# Altium PCB PCB_typeC.PcbDoc
Units mm, origin at the board's own origin, x right, y up, seen from the top; angles counter-clockwise.
Board outline 132 x 50.15 mm, 2 copper layers (Top Layer, Bottom Layer), stack 1 mm thick; 71 components, 45 nets, 213 pads, 136 vias.
Unrouted connection lines stored in the file: 3.
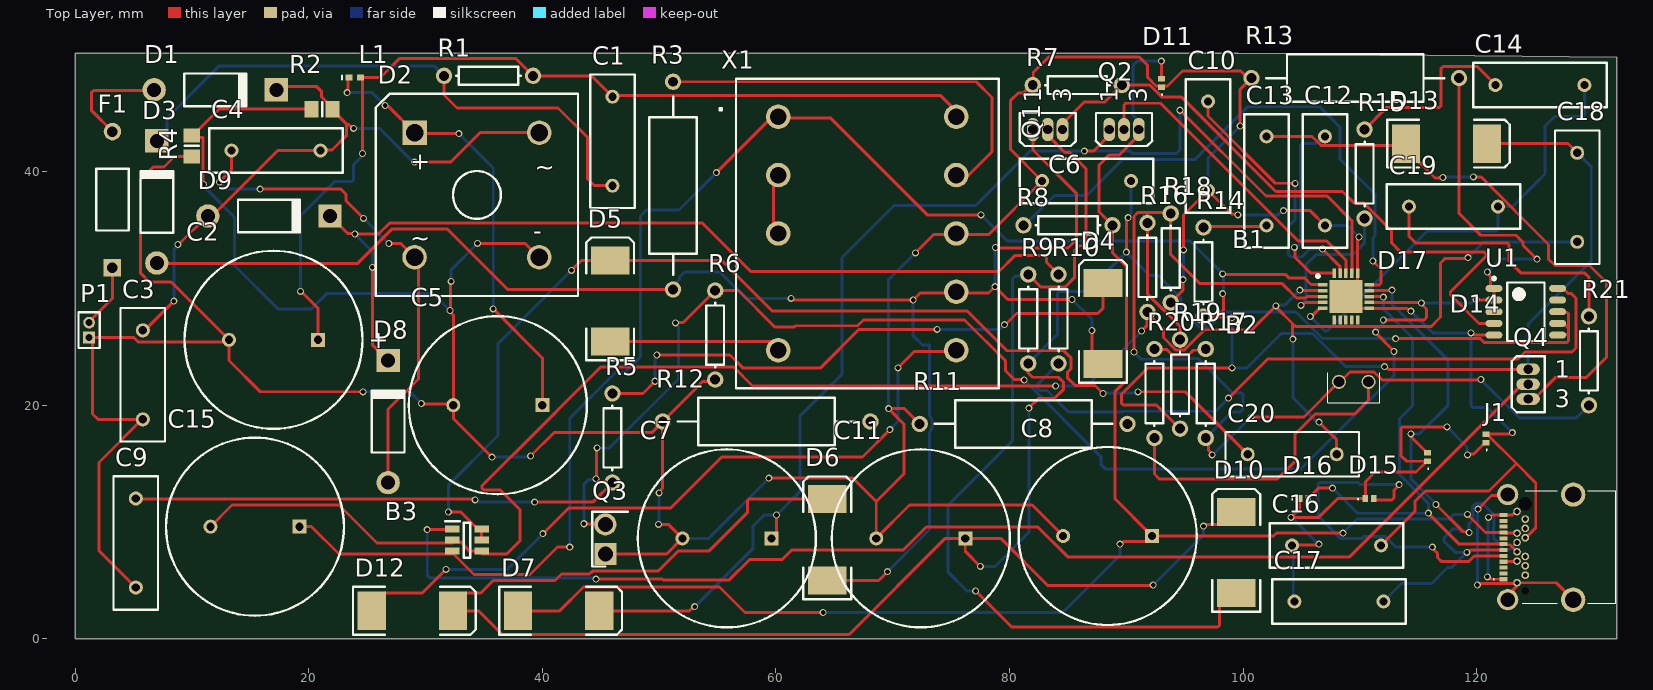
[diagram p0: Top Layer view]
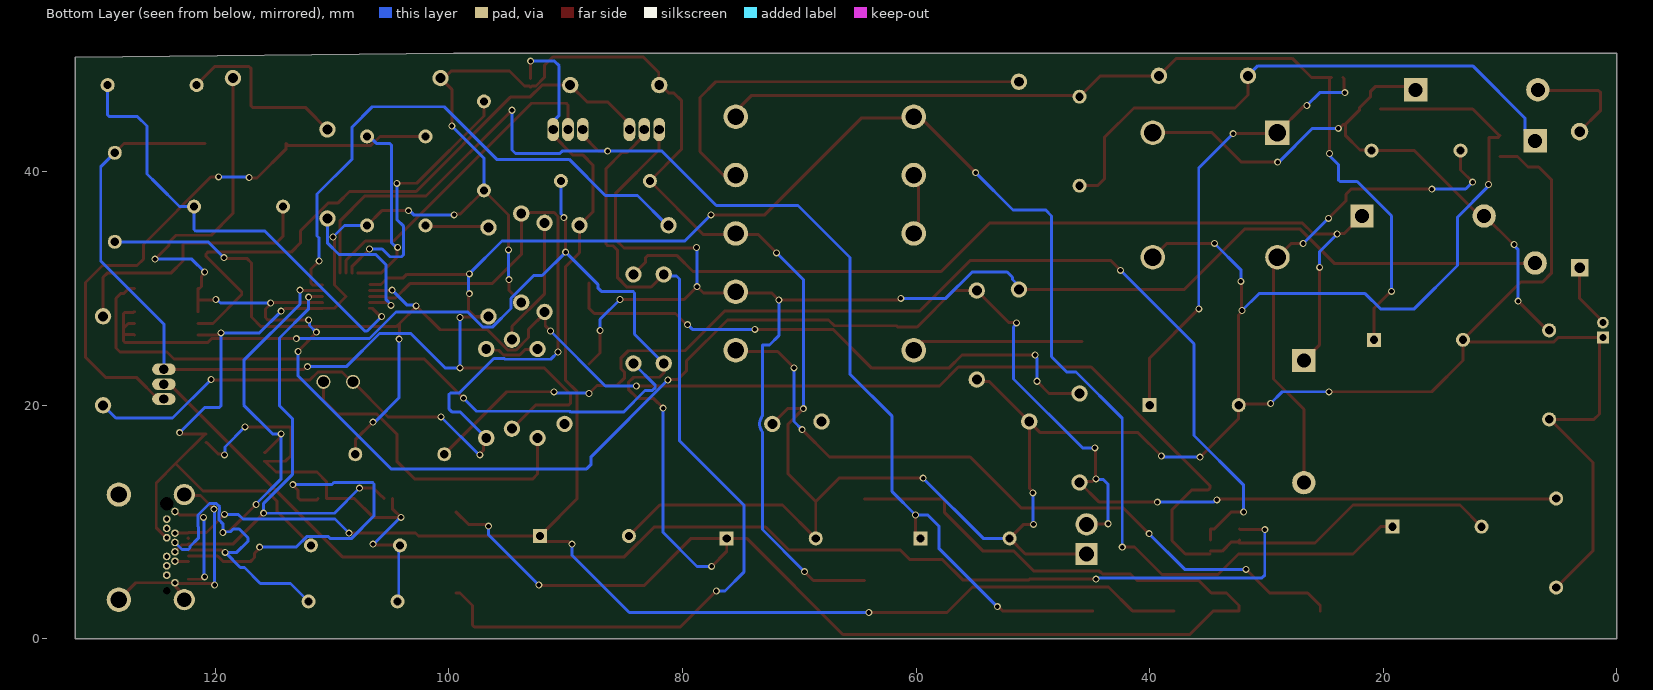
[diagram p1: Bottom Layer view, seen from below]

## Layer stack, top to bottom
Top Solder: solder mask 0.05, Solder Resist, Dk 3.5
Top Layer: signal copper 0.1
Dielectric 1: dielectric 0.8, FR-4, Dk 4.8
Bottom Layer: signal copper 0.1
Bottom Solder: solder mask 0.05, Solder Resist, Dk 3.5

## Board outline
132,0 132,49.8 99.6,50.146 -0.001,50.146 0,0

## Design rules (kind name [scope] priority, off if disabled: settings)
Clearance 74030 [All] p1: gap=0.05 ignorepadtopadclearanceinfootprint=FALSE
Clearance [All] p2: gap=0.254 ignorepadtopadclearanceinfootprint=FALSE except(0: Arc-Hole Track-Hole SMDPad-Hole THPad-Hole Via-Hole Fill-Hole Poly-Hole Region-Hole Text-Hole)
MinimumSolderMaskSliver [All] p1: minsoldermaskwidth=0.05
PolygonConnect [All] p1: connectstyle=Relief reliefconductorwidth=0.254 reliefentries=4 polygonreliefangle="90 Angle" airgapwidth=0.254
RoutingVias [All] p1: holewidth=0.4 width=0.6 viastyle="Through Hole" minholewidth=0.4 minwidth=0.6 maxholewidth=0.4 maxwidth=0.6
SolderMaskExpansion [All] p1: expansion=0.102 istentingtop=FALSE
Width Width_1 [All] p1: maxlimit=0.254 minlimit=0.254 preferedwidth=0.254
Width [InNet('VCC')] p2: maxlimit=0.51 minlimit=0.4 preferedwidth=0.5
29 further rules are at their usual default settings.

## Components (designator, comment, footprint, x,y, rotation, side; value= is the part's Value field where it differs from the comment)
B1 "FUSB15101MNTWG" QFN50P400X400X100-21N 108.8,29.3 r0 top
B2 "QEE113E3R0" QEE113E3R0 108.2,22 r0 top
B3 "NCP4307FASNT1G" SOT95P275X110-6N 33.55,8.45 r0 top
C1 "Cap" RAD-0.3 46,42.6 r90 top value=100pF
C2 "Cap Pol1" RB7.6-15 16.99,25.6 r0 top value=100pF
C3 "Cap" RAD-0.3 5.8,22.6 r90 top value=100pF
C4 "Cap" RAD-0.3 17.2,41.8 r0 top value=100pF
C5 "Cap Pol1" RB7.6-15 36.19,20 r0 top value=100pF
C6 "Cap" RAD-0.3 86.6,39.2 r0 top value=100pF
C7 "" RB7.6-15 55.8,8.6 r0 top value=100pF
C8 "Cap Pol1" RB7.6-15 88.4,8.8 r0 top value=100pF
C9 "Cap" RAD-0.3 5.2,8.2 r90 top value=100pF
C10 "Cap" RAD-0.3 97,42.2 r90 top value=100pF
C11 "Cap Pol1" RB7.6-15 72.4,8.6 r0 top value=100pF
C12 "Cap" RAD-0.3 107,39.2 r90 top value=100pF
C13 "Cap" RAD-0.3 102,39.2 r90 top value=100pF
C14 "Cap" RAD-0.3 125.4,47.4 r0 top value=100pF
C15 "Cap Pol1" RB7.6-15 15.4,9.6 r0 top value=100pF
C16 "Cap" RAD-0.3 108,8 r0 top value=100pF
C17 "Cap" RAD-0.3 108.2,3.2 r0 top value=100pF
C18 "Cap" RAD-0.3 128.6,37.8 r90 top value=100pF
C19 "Cap" RAD-0.3 118,37 r0 top value=100pF
C20 "Cap" RAD-0.3 104.2,15.8 r0 top value=100pF
D1 "Diode 1N4001" DO-41 12,47 r0 top
D2 "Bridge2" D-46_6A 34.4,38 r0 top
D3 "Diode 1N4001" DO-41 7,37.4 r90 top
D4 "Diode" SMC 88,27 r90 top
D5 "Diode" SMC 45.8,28.925 r90 top
D6 "Diode" SMC 64.4,8.475 r90 top
D7 "Diode" SMC 41.4,2.4 r0 top
D8 "Diode 1N4001" DO-41 26.8,18.6 r90 top
D9 "Diode 1N4001" DO-41 16.6,36.2 r0 top
D10 "" SMC 99.4,7.4 r90 top
D11 "SZESD7241N2T5G" SZESD7462N2T5G 93,47.585 r90 top
D12 "Diode" SMC 28.875,2.4 r0 top
D13 "Diode" SMC 117.4,42.4 r0 top
D14 "SZESD7241N2T5G" SZESD7462N2T5G 120.8,17.165 r90 top
D15 "SZESD7241N2T5G" SZESD7462N2T5G 110.835,12 r0 top
D16 "SZESD7241N2T5G" SZESD7462N2T5G 105.2,12 r0 top
D17 "SZESD7241N2T5G" SZESD7462N2T5G 115.8,15.565 r90 top
F1 "Fuse 1" PIN-W2/E2.8 3.2,37.6 r90 top
J1 "UJ31-CH-G2-SMT-TR" UJ31CHG2SMTTR 128.25,7.85 r90 top
L1 "Inductor" 0402-A 23.95,48.05 r0 top value=10mH
P1 "MHDR1X2" MHDR1X2 1.2,25.8 r90 top
Q1 "MOSFET-N" E3 83.27,43.6 r90 top
Q2 "MOSFET-N" E3 89.8,43.6 r90 top
Q3 "QSE113" TO254P304X444X533-2P 45.4,7.26 r90 top
Q4 "MOSFET-N" E3 124.4,21.8 r0 top
R1 "Res1" AXIAL-0.3 35.4,48.2 r0 top value=1K
R2 "Res Varistor" 6-0805_N 21.15,45.35 r0 top
R3 "Res Adj1" AXIAL-0.7 51.2,38.8 r90 top value=1K
R4 "Res Varistor" 6-0805_N 10,42.2 r90 top
R5 "Res1" AXIAL-0.3 46,17.2 r90 top value=1K
R6 "Res1" AXIAL-0.3 54.8,26 r90 top value=1K
R7 "Res1" AXIAL-0.3 85.8,47.4 r0 top value=1K
R8 "Res1" AXIAL-0.3 85,35.4 r0 top value=1K
R9 "Res1" AXIAL-0.3 81.6,27.39 r90 top value=1K
R10 "Res1" AXIAL-0.3 84.2,27.39 r90 top value=1K
R11 "Res Adj1" AXIAL-0.7 81.2,18.4 r0 top value=1K
R12 "Res Adj1" AXIAL-0.7 59.2,18.6 r0 top value=1K
R13 "Res Adj1" AXIAL-0.7 109.6,48 r0 top value=1K
R14 "Res1" AXIAL-0.3 96.6,31.4 r90 top value=1K
R15 "Res1" AXIAL-0.3 110.4,39.8 r90 top value=1K
R16 "Res1" AXIAL-0.3 91.8,31.8 r90 top value=1K
R17 "Res1" AXIAL-0.3 96.8,21 r90 top value=1K
R18 "Res1" AXIAL-0.3 93.8,32.6 r90 top value=1K
R19 "Res1" AXIAL-0.3 94.6,21.8 r90 top value=1K
R20 "Res1" AXIAL-0.3 92.4,21 r90 top value=1K
R21 "Res1" AXIAL-0.3 129.6,23.8 r90 top value=1K
U1 "NCP1345" SOP100P600X265-10N 124.2,28 r0 top
X1 "74030" 74030 67.83,34.7 r0 top

## Footprints (in the part's own frame and the unit in brackets; to place one, negate y for a bottom-side part, rotate by r counter-clockwise, add the part's x,y. Pads: shape width x height; smd on the part's side, far side on the other; paste and mask are expansions set on the pad)
6-0805_N [mm] "Chip Resistor, Body 2.0x1.2mm, IPC Medium Density"
  rect 1.2x1.4 smd: 1(-0.9,0) 2(0.9,0)
  silkscreen extent 0,-0.6 0,0.6, body extent -1.8,-1 1.8,1, height 0.7
0402-A [mm] "Chip Inductor, Body 1.0x0.5mm, IPC High Density"
  rect 0.6x0.5 smd: 1(-0.5,0) 2(0.5,0)
  silkscreen extent -1.1,-0.15 -1.1,0.15, body extent -0.95,-0.4 0.95,0.4, height 0.55
74030 [mm]
  round 2.1 hole 1.4: 1(-7.62,10) 2(-7.62,5) 3(-7.62,0) 5(-7.62,-10) 6(7.62,-10) 7(7.62,-5) 8(7.62,0) 9(7.62,5) 10(7.62,10)
  silkscreen extent -12.66,-13.25 11.25,13.25, body extent -11.35,-13.35 11.35,13.35, height 12.7
AXIAL-0.3 [mm] "Axial Device, Thru-Hole; 2 Leads; 0.3 in Pin Spacing"
  round 1.4 hole 0.85: 1(-3.81,0) 2(3.81,0)
  silkscreen extent -2.77,-0.76 2.77,0.76, body extent -4.61,-0.86 4.61,0.86, height 1.52
AXIAL-0.7 [mm] "Axial Device, Thru-Hole; 2 Leads; 0.7 in Pin Spacing"
  round 1.4 hole 0.85: 1(-8.89,0) 2(8.89,0)
  silkscreen extent -7.62,-2.03 7.62,2.03, body extent -9.69,-2.13 9.69,2.13, height 4.06
D-46_6A [mm] "Bridge Rectifier; 4 Terminals; Body 16.8 x 16.8 mm (typ); Pitch 10.67 mm"
  rect 2.1x2.1 hole 1.5: 1(-5.335,5.335)
  round 2.1 hole 1.5: 2(-5.335,-5.335) 3(5.335,-5.335) 4(5.335,5.335)
  silkscreen extent -8.65,-8.65 8.65,8.65, body extent -8.75,-8.75 8.75,8.75, height 6.35
DO-41 [mm] "Diode, Axial; Body 5.2 x 2.7 mm (LxDia. max), Lead Dia. 0.86 mm (max)"
  round 2 hole 1.2: 1(-5.23,0)
  rect 2x2 hole 1.2: 2(5.23,0)
  silkscreen extent -2.65,-1.4 2.75,1.4, body extent -6.33,-1.5 6.33,1.5, height 2.8
E3 [mm] "TO, Flat Index; 3 In-Line, Axial Leads; Body Dia. 4.6mm; Lead Dia. 0.5 mm (max)"
  oval 2x1 hole 0.8: 1(0,1.27) 2(0,0) 3(0,-1.27)
  silkscreen extent -1.41,-2.41 1.41,2.41, body extent -1.51,-2.51 1.51,2.51, height 4.01
MHDR1X2 [mm] "Connector; Header; 2 Position"
  rect 1x1 hole 0.6: 1(0,0)
  round 1 hole 0.6: 2(1.27,0)
  silkscreen extent -0.9,-0.9 2.17,0.9, body extent -1,-1 2.27,1
PIN-W2/E2.8 [mm] "Thru-Hole; 2 Leads"
  rect 1.5x1.5 hole 0.9: 1(-5.825,0)
  round 1.5 hole 0.9: 2(5.825,0)
  silkscreen extent -2.65,-1.4 2.65,1.4, body extent -6.68,-1.5 6.68,1.5
QEE113E3R0 [mm]
  round 1.2 hole 0.92: 1(0,0) 2(2.54,0)
  silkscreen extent -0.95,-1.78 3.49,0.76, body extent -10,-3.38 10,3.38, height 5.8
QFN50P400X400X100-21N [mm]
  rect 0.8x0.3 smd mask+0.051: 1(-2,1) 2(-2,0.5) 3(-2,0) 4(-2,-0.5) 5(-2,-1) 11(2,-1) 12(2,-0.5) 13(2,0) 14(2,0.5) 15(2,1)
  rect 0.3x0.8 smd mask+0.051: 6(-1,-2) 7(-0.5,-2) 8(0,-2) 9(0.5,-2) 10(1,-2) 16(1,2) 17(0.5,2) 18(0,2) 19(-0.5,2) 20(-1,2)
  rect 2.8x2.8 smd: 21(0,0)
  silkscreen extent -2.52,1.63 -2.27,1.87
RAD-0.3 [mm] "Radial Cap, Thru-Hole; 2 Leads; 0.3 in Pin Spacing"
  round 1.2 hole 0.7: 1(-3.81,0) 2(3.81,0)
  silkscreen extent -5.71,-1.91 5.71,1.91, body extent -5.81,-2 5.81,2, height 6
RB7.6-15 [mm] "Polarized Capacitor (Radial); 2 Leads"
  rect 1.2x1.2 hole 0.7: 1(3.81,0)
  round 1.2 hole 0.7: 2(-3.81,0)
  silkscreen extent -7.62,-7.62 7.62,7.62, body extent -7.72,-7.72 7.72,7.72
SMC [mm] "DO-214-AB/SMC; 2 C-Bend Leads; Body 7.9 x 5.9 mm, inc. leads (LxW)"
  rect 2.4x3.3 smd: 1(-3.475,0) 2(3.475,0)
  silkscreen extent -5.07,-2.05 5.43,2.05, body extent -5.17,-2.15 5.53,2.15, height 2.65
SOP100P600X265-10N [mm] "SOP, 10-Leads, Body 4.90x3.90mm, Pitch 1.00mm, IPC Medium Density"
  oval 1.45x0.6 smd: 1(-2.725,2) 2(-2.725,1) 3(-2.725,0) 4(-2.725,-1) 5(-2.725,-2) 6(2.725,-2) 7(2.725,-1) 8(2.725,0) 9(2.725,1) 10(2.725,2)
  silkscreen extent -2.85,-2.5 1.6,2.97, body extent -2,-2.5 2,2.5, height 2.65
SOT95P275X110-6N [mm]
  rect 1.25x0.6 smd: 1(-1.25,0.95) 2(-1.25,0) 3(-1.25,-0.95) 4(1.25,-0.95) 5(1.25,0) 6(1.25,0.95)
  silkscreen extent -1.88,-1.5 0.28,1.6, body extent -10,-3.38 10,3.38, height 5.8
SZESD7462N2T5G [mm]
  rect 0.47x0.6 smd: 1(-0.365,0) 2(0.365,0)
  silkscreen extent -1.05,-0.1 -0.95,0, body extent -2.1,-1.35 1.65,1.35
TO254P304X444X533-2P [mm]
  rect 1.905x1.905 / inner round 1.905 / far side rect 1.905x1.905 hole 1.27: 1(0,0)
  round 1.905 hole 1.27: 2(2.54,0)
  silkscreen extent -1.07,-1.93 3.61,1.11, body extent -1.35,-2.2 3.89,1.38
UJ31CHG2SMTTR [mm]
  rect 0.35x0.7 smd mask+0.051: A1(-2.75,5.95) A2(-2.25,5.95) A3(-1.75,5.95) A4(-1.25,5.95) A5(-0.75,5.95) A6(-0.25,5.95) A7(0.25,5.95) A8(0.75,5.95) A9(1.25,5.95) A10(1.75,5.95) A11(2.25,5.95) A12(2.75,5.95)
  round 0.65 hole 0.4: B1(3.05,4.8) B12(-3.05,4.8)
  round 0.65 hole 0.4 paste+0 mask+0.051: B2(2.4,4.1) B3(1.6,4.1) B4(1.2,4.8) B5(0.8,4.1) B6(0.4,4.8) B7(-0.4,4.8) B8(-0.8,4.1) B9(-1.2,4.8) B10(-1.6,4.1) B11(-2.4,4.1)
  round 0.575 hole 1.15 unplated: MH5(3.725,4.1)
  round 0.325 hole 0.65 unplated: MH6(-3.725,4.1)
  round 1.815 hole 1.22: S1(-4.5,5.6) S4(4.5,5.6)
  round 2.085 hole 1.393: S2(-4.5,0) S3(4.5,0)
  silkscreen extent -4.82,-3.65 4.82,6.85, body extent -10,-3.38 10,3.38, height 5.8

## Part data
B1: "Programmable USB Type-C and Power Delivery 3.1 Source Controller with PPS Support", Manufacturer_Name=onsemi, Mouser Part Number=863-FUSB15101MNTWG, Datasheet Link=https://www.onsemi.com/download/data-sheet/pdf/fusb15101-d.pdf, Geometry.Height=1mm, Manufacturer_Part_Number=FUSB15101MNTWG, Mouser Price/Stock=https://www.mouser.co.uk/ProductDetail/onsemi/FUSB15101MNTWG?qs=vvQtp7zwQdPKtIXEUZSS0g%3D%3D
B2: "Infrared Emitters infrared Lt Emitting Plastic", Manufacturer_Name=onsemi, Mouser Part Number=512-QEE113E3R0, Arrow Part Number=QEE113E3R0, Arrow Price/Stock=https://www.arrow.com/en/products/qee113e3r0/on-semiconductor?region=nac, Datasheet Link=https://www.arrow.com/en/products/qee113e3r0/on-semiconductor, Geometry.Height=5.08mm, Manufacturer_Part_Number=QEE113E3R0, Mouser Price/Stock=https://www.mouser.co.uk/ProductDetail/ON-Semiconductor-Fairchild/QEE113E3R0?qs=q8yi3gPquyFixpeP%252BjxTrw%3D%3D
B3: "Secondary Side Synchronous Rectification Driver with Dual Supply", Manufacturer_Name=onsemi, Datasheet Link=https://www.onsemi.com/download/data-sheet/pdf/ncp4307-d.pdf, Geometry.Height=1.1mm, Manufacturer_Part_Number=NCP4307FASNT1G
C1 C3 C4 C6 C9 C10 C12 C13 C14 C16 C17 C18 C19 C20: "Capacitor", LatestRevisionDate=17-Jul-2002, LatestRevisionNote="Re-released for DXP Platform.", PackageDescription="Radial Cap, Thru-Hole; 2 Leads; 0.3 in Pin Spacing", PackageReference=RAD-0.3, Published=8-Jun-2000, Publisher="Altium Limited"
C2 C5 C8 C11 C15: "Polarized Capacitor (Radial)", LatestRevisionDate=17-Jul-2002, LatestRevisionNote="Re-released for DXP Platform.", PackageDescription="Polarized Capacitor (Radial); 2 Leads", PackageReference=RB7.6-15, Published=8-Jun-2000, Publisher="Altium Limited"
C7: library part "Cap Pol1", "Polarized Capacitor (Radial)", LatestRevisionDate=17-Jul-2002, LatestRevisionNote="Re-released for DXP Platform.", PackageDescription="Polarized Capacitor (Radial); 2 Leads", PackageReference=RB7.6-15, Published=8-Jun-2000, Publisher="Altium Limited"
D1 D3 D8 D9: "1 Amp General Purpose Rectifier", Code_JEDEC=DO-204-AL, ComponentLink1Description="Manufacturer Link", ComponentLink1URL=http://www.fairchildsemi.com/, ComponentLink2Description=Datasheet, ComponentLink2URL=http://www.fairchildsemi.com/ds/1N%2F1N4001.pdf, DatasheetVersion=1998, LatestRevisionDate=17-Jul-2002, LatestRevisionNote="Re-released for DXP Platform.", PackageDescription="Diode, Axial; Body 5.2 x 2.7 mm (LxDia. max), Lead Dia. 0.86 mm (max)", PackageReference=DO-41, PackageVersion=Aug-1999, Published=8-Jun-2000, Publisher="Altium Limited"
D2: "Diode Bridge", LatestRevisionDate=17-Jul-2002, LatestRevisionNote="Re-released for DXP Platform.", PackageDescription="Bridge Rectifier; 4 Terminals; Body 16.8 x 16.8 mm (typ); Pitch 10.67 mm", PackageReference=D-46_6A, Published=24-Mar-1999, Publisher="Altium Limited"
D4 D5 D6 D7 D12 D13: "Default Diode", Code_JEDEC=DO-214-AB, LatestRevisionDate=17-Jul-2002, LatestRevisionNote="Re-released for DXP Platform.", PackageDescription="DO-214-AB/SMC; 2 C-Bend Leads; Body 7.9 x 5.9 mm, inc. leads (LxW)", PackageReference=SMC, PackageVersion=Sep-1996, Published=8-Jun-2000, Publisher="Altium Limited"
D10: library part Diode, "Default Diode", Code_JEDEC=DO-214-AB, LatestRevisionDate=17-Jul-2002, LatestRevisionNote="Re-released for DXP Platform.", PackageDescription="DO-214-AB/SMC; 2 C-Bend Leads; Body 7.9 x 5.9 mm, inc. leads (LxW)", PackageReference=SMC, PackageVersion=Sep-1996, Published=8-Jun-2000, Publisher="Altium Limited"
D11 D14 D15 D16 D17: "ESD Suppressors / TVS Diodes SZ 24V VRWM ESD PROTECTION", Manufacturer_Name=onsemi, Mouser Part Number=863-SZESD7241N2T5G, Datasheet Link=https://www.onsemi.com/pub/Collateral/ESD7241-D.PDF, Geometry.Height=0.4mm, Manufacturer_Part_Number=SZESD7241N2T5G, Mouser Price/Stock=https://www.mouser.co.uk/ProductDetail/onsemi/SZESD7241N2T5G?qs=z6PAvqrnkvSq0oMCl81g4Q%3D%3D
F1: "Fuse", LatestRevisionDate=17-Jul-2002, LatestRevisionNote="Re-released for DXP Platform.", PackageDescription="Thru-Hole; 2 Leads", PackageReference=PIN-W2/E2.8, Published=8-Jun-2000, Publisher="Altium Limited"
J1: "USB Connectors USB jack 3.1 C type 24pin Horz SMT", Manufacturer_Name="CUI Devices", Mouser Part Number=490-UJ31-CH-G2SMT-TR, Arrow Part Number=UJ31-CH-G2-SMT-TR, Arrow Price/Stock=https://www.arrow.com/en/products/uj31-ch-g2-smt-tr/cui-devices?region=nac, Datasheet Link=https://www.arrow.com/en/products/uj31-ch-g2-smt-tr/cui-devices, Geometry.Height=4.66mm, Manufacturer_Part_Number=UJ31-CH-G2-SMT-TR, Mouser Price/Stock=https://www.mouser.co.uk/ProductDetail/CUI-Devices/UJ31-CH-G2-SMT-TR?qs=W0yvOO0ixfGEsh2EYrPgIQ%3D%3D
P1: "Header, 2-Pin", LatestRevisionDate=17-Jul-2002, LatestRevisionNote="Re-released for DXP Platform.", Publisher="Altium Limited"
Q1 Q2 Q4: "N-Channel MOSFET", LatestRevisionDate=17-Jul-2002, LatestRevisionNote="Re-released for DXP Platform.", PackageDescription="TO, Flat Index; 3 In-Line, Axial Leads; Body Dia. 4.6mm; Lead Dia. 0.5 mm (max)", PackageReference=E3, PackageVersion=1995/1996, Published=8-Jun-2000, Publisher="Altium Limited"
Q3: "IC, Fairchild, QSE113 Fairchild Semiconductor QSE113 25 ?? Infrared Phototransistor, Through-hole Side-looker Package", Manufacturer_Name=onsemi, Mouser Part Number=512-QSE113, Arrow Part Number=QSE113, Arrow Price/Stock=https://www.arrow.com/en/products/qse113/on-semiconductor, Geometry.Height=3.04mm, Manufacturer_Part_Number=QSE113, Mouser Price/Stock=https://www.mouser.com/Search/Refine.aspx?Keyword=512-QSE113
R1 R5 R6 R7 R8 R9 R10 R14 R15 R16 R17 R18 R19 R20 R21: "Resistor", LatestRevisionDate=17-Jul-2002, LatestRevisionNote="Re-released for DXP Platform.", PackageDescription="Axial Device, Thru-Hole; 2 Leads; 0.3 in Pin Spacing", PackageReference=AXIAL-0.3, Published=8-Jun-2000, Publisher="Altium Limited"
R2 R4: "Varistor (Voltage-Sensitive Resistor)", Code_IPC=RESC2012, LatestRevisionDate=29-May-2009, LatestRevisionNote="IPC-7351 Footprint Added.", PackageDescription="Chip Resistor 0805 Case Size", PackageReference=6-0805, PackageVersion=Mar-2003, Published=24-Mar-1999, Publisher="Altium Limited"
R3 R11 R12 R13: "Variable Resistor", LatestRevisionDate=17-Jul-2002, LatestRevisionNote="Re-released for DXP Platform.", PackageDescription="Axial Device, Thru-Hole; 2 Leads; 0.7 in Pin Spacing", PackageReference=AXIAL-0.7, Published=8-Jun-2000, Publisher="Altium Limited", Set Position=0.5
X1: "Transformer PCB Flyback EE25 750uH 3 Output 15  30W Flyback Switch Mode Power Supply Transformer, 85  265V ac", Manufacturer_Name=MYRRA, Arrow Part Number=74030, Arrow Price/Stock=https://www.arrow.com/en/products/74030/myrra, Manufacturer_Part_Number=74030
L1: Code_IEC=1005, Code_JEITA=0402, LatestRevisionDate=29-May-2009, LatestRevisionNote="IPC-7351 Footprint Added.", PackageDescription="Chip Inductor", PackageReference=0402-A, Published=8-Jun-2000, Publisher="Altium Limited"

## Via types
v1: diameter 0.6, hole 0.4, Top Layer to Bottom Layer, 136 vias

## Nets (pads, with @x,y where several pads share a name; then routed paths per layer and width w, separated by ;. In a path a pad name is that pad's centre, name@x,y a point inside that pad or via, vN(x,y) a via of type N, cw(c..) or ccw(c..) an arc to the next point about the centre after c; other vN are vias at no path point)
GND: B1.11 B1.16 B1.21 C2.2 C3.1 C5.2 C6.1 C7.2 C8.2 C9.1 C10.1 C11.2 C12.1 C16.2 D2.3 D11.1 D14.2 J1.B5 P1.1 Q3.1 R2.1 R4.1 R4.2 R6.1 R7.1 R11.1 R12.1 R13.1 R18.1 U1.5 X1.8 | length 408.9
  Top Layer w0.254: C9.1 2.05,7.54 2.05,15.1 C3.1@5.74,18.79 ; C3.1 C3.1@5.74,18.79 ; R4.1 8.513,41.3 7.613,40.4 6.7,40.4 5.619,39.319 5.619,31.289 6.358,30.55 8.23,30.55 C2.2 ; v1(11,38.9) 10.95,38.95 10.95,42.901 10.199,42.901 R4.2 10.1,43.1 12.35,45.35 R2.1 ; v1(24.65,21.15) 15.85,21.15 13.18,23.82 C2.2 ; v1(29.65,20.15) 29.716,20.084 32.296,20.084 C5.2 ; v1(32.2,30.6) 32.15,30.55 32.15,28.15 v1(32.1,28.1) 32.1,28.006 32.38,27.726 C5.2 ; v1(34.45,33.85) 38.55,33.85 D2.3 ; v1(35.7,15.55) 32.38,18.87 C5.2 ; v1(39,15.65) 41,17.65 49.36,17.65 R12.1 ; Q3.1 50.65,7.26 C7.2 50.79,9.8 v1(49.95,9.8) ; v1(50,12.5) 50,12.594 50.31,12.904 R12.1 ; R6.1 54.619,22.009 53.719,22.009 R12.1 ; v1(59.4,13.75) 66.6,13.75 68.59,11.76 ; v1(71.95,33.05) 73.5,34.6 78.19,34.6 C6.1 80.1,41.89 80.1,46.1 80.715,46.715 81.146,46.715 81.831,47.4 R7.1 82.031,47.441 82.031,48.481 83.35,49.8 91.1,49.8 91.824,49.076 91.824,48.052 92.548,47.328 92.892,47.328 D11.1 93.108,47.328 93.528,47.328 94.8,48.6 99.8,48.6 100.4,48 R13.1 99.75,47.04 v1(99.75,43.9) ; R11.1 71.01,19.7 v1(69.65,19.7) 70.95,18.4 70.95,14.12 68.59,11.76 ; C8.2 81.94,11.45 71.44,11.45 C11.2 68.59,11.76 ; R18.1 94.85,29.84 v1(94.85,30.75) ; v1(94.9,33.3) 94.9,36.29 C10.1 99.024,36.366 99.484,36.366 v1(99.55,36.3) ; v1(103.45,36.65) 105.74,36.65 C12.1 ; v1(109.923,34.4) 109.923,34.306 109.8,34.183 B1.16 109.8,30.3 B1.21 109.8,28.3 B1.11 ; B1.11@110.8,28.277 114.029,28.277 114.256,28.05 v1(114.35,28.05) ; C16.2 114.7,10.89 114.7,11.75 115.6,12.65 121.05,12.65 123.398,14.997 ; v1(119.5,26.2) 119.594,26.2 119.794,26 U1.5 ; D14.2 D14.2@120.865,17.53 ; v1(123.05,17.65) 122.956,17.65 122.836,17.53 D14.2@120.865,17.53 ; J1.B5 124.2,8.65 125.05,9.5 125.05,13.345 123.398,14.997 ; C3.1@5.74,18.79 1.96,18.79 1.5,19.25 1.5,25.5 P1.1 5.023,25.8 5.394,25.429 13.009,25.429 C2.2 ; D14.2@120.865,17.53 123.398,14.997
  Bottom Layer w0.254: v1(11,38.9) 11.05,38.85 11.05,38.7 13.65,36.1 13.65,31.95 17.35,28.25 20.25,28.25 21.55,29.55 30.65,29.55 v1(32.1,28.1) ; v1(24.65,21.15) 28.65,21.15 v1(29.65,20.15) ; v1(32.2,30.6) 32.2,31.6 v1(34.45,33.85) ; v1(35.7,15.55) 38.9,15.55 v1(39,15.65) ; v1(49.95,9.8) 49.975,9.825 49.975,12.475 v1(50,12.5) ; C7.2 54.25,8.6 v1(59.4,13.75) ; v1(69.65,19.7) 69.65,30.75 v1(71.95,33.05) ; v1(94.85,30.75) 94.9,30.8 v1(94.9,33.3) ; C10.1 97,41.15 v1(99.75,43.9) ; v1(99.55,36.3) 103.006,36.3 103.356,36.65 v1(103.45,36.65) ; C12.1 108.933,35.39 v1(109.923,34.4) ; v1(114.35,28.05) 116.2,26.2 v1(119.5,26.2) 119.5,19.95 119.65,19.8 120.9,19.8 v1(123.05,17.65)
NetB1_1: B1.1 B3.3 C15.1 C18.2 D13.2 Q4.1 R14.1 R19.1 X1.1 | length 211
  Top Layer w0.254: C15.1 20.25,9.6 22.6,7.25 32.4,7.25 34.15,5.5 38.95,5.5 41.3,7.85 v1(42.35,7.85) ; v1(54.9,39.9) 59.255,44.255 60.435,44.255 60.78,44.6 64.65,44.6 72.95,36.3 v1(77.55,36.3) ; R19.1 92.59,20 89.749,20 89.6,20.149 89.6,20.95 91.85,23.2 v1(99.05,23.2) ; v1(98.25,29.55) 98.3,29.5 98.3,28.1 97.79,27.59 R14.1 96.645,27.545 99.005,27.545 v1(99.05,27.5) ; v1(98.25,31.25) 98.3,31.2 103.6,31.2 103.9,30.9 105.25,30.9 105.819,30.331 106.399,30.331 106.407,30.323 B1.1@106.769,30.323 ; v1(112.1,23.3) 112.194,23.3 112.424,23.07 Q4.1 ; D13.2 127.81,42.4 C18.2
  Bottom Layer w0.254: v1(42.35,7.85) 42.35,18.889 46.311,22.85 47.1,22.85 48.4,24.15 48.4,36.2 48.9,36.7 51.7,36.7 v1(54.9,39.9) ; v1(77.55,36.3) 79.8,34.05 95.45,34.05 v1(98.25,31.25) 98.3,31.2 98.3,29.6 v1(98.25,29.55) ; v1(99.05,27.5) v1(99.05,23.2) 100.332,23.2 103.259,26.127 105.947,26.127 108.774,23.3 v1(112.1,23.3) ; Q4.1 124.4,26.95 129.8,32.35 129.8,40.41 C18.2
NetB1_2: B1.2 B3.2 B3.4 C15.2 C18.1 C20.2 R16.1 | length 165.6
  Top Layer w0.254: C15.2 13.437,11.447 22.6,11.447 25.847,8.2 B3.2@32.35,8.2 ; B3.2 32.473,8.277 33.017,8.277 33.794,7.5 B3.4 ; B3.4@34.85,7.25 36.95,7.25 38.1,8.4 38.1,11.05 36.4,12.75 34.994,12.75 34.845,12.899 34.845,13.109 37.586,15.849 37.588,15.849 45.01,23.271 56.382,23.271 58.003,21.65 v1(83.95,21.65) ; v1(91.3,26.35) 91.746,26.796 91.746,27.936 R16.1 91.8,27.879 93.181,26.498 93.181,25.789 94.237,24.733 94.963,24.733 96.688,26.457 100.74,26.457 102.782,28.5 v1(102.8,28.5) 102.8,28.429 104.231,26.998 ; v1(104.25,25.65) 104.231,25.669 104.231,26.998 ; v1(104.85,29.85) 104.877,29.823 106.777,29.823 B1.2 ; v1(106.5,18.55) 108.01,17.04 C20.2 ; v1(119.25,32.623) 119.198,32.571 117.297,32.571 116.9,32.175 116.9,27.55 116.073,26.723 104.506,26.723 104.231,26.998
  Bottom Layer w0.254: v1(83.95,21.65) 86.6,21.65 v1(91.3,26.35) ; v1(102.8,28.5) 102.866,28.566 103.566,28.566 v1(104.85,29.85) ; v1(104.25,25.65) 104.25,20.65 106.35,18.55 v1(106.5,18.55) ; v1(119.25,32.623) 120.617,33.99 C18.1
NetB1_3: B1.3 B2.1 R17.1 R18.2 R21.1 | length 88.4
  Top Layer w0.254: v1(90.65,24.55) 90.65,36.15 90.987,36.487 93.723,36.487 R18.2 93.8,32.9 96.3,30.4 103.337,30.4 104.568,29.169 105.343,29.169 105.474,29.3 B1.3 ; R17.1 97.019,16.971 97.019,16.174 97.35,15.844 v1(97.35,15.75) ; v1(100.675,19) 105.2,19 B2.1 108.287,22 109.137,22.85 111.2,22.85 111.9,22.15 120.3,22.15 v1(120.35,22.2)
  Bottom Layer w0.254: v1(90.65,24.55) 91.267,23.933 95.183,23.933 95.25,24 96.15,24 99.1,21.05 99.851,21.05 100,20.901 100,19.7 99.7,19.4 99.01,19.4 R17.1 ; v1(97.35,15.75) 97.425,15.75 v1(100.675,19) ; v1(120.35,22.2) 123.65,18.9 128.51,18.9 R21.1
NetB1_4: B1.4 R15.1 | length 13.5
  Top Layer w0.254: v1(104.95,28.55) 105.044,28.55 105.294,28.8 B1.4
  Bottom Layer w0.254: v1(104.95,28.55) 104.95,28.613 105.4,29.063 105.4,32.05 106.25,32.9 109.4,32.9 110.4,33.9 R15.1
NetB1_5: B1.5 C14.2 C19.2 | length 39.1
  Top Layer w0.254: v1(105.75,27.6) 105.816,27.666 105.916,27.666 106.55,28.3 B1.5
  Bottom Layer w0.254: v1(105.75,27.6) 106.995,26.355 107.205,26.355 115.75,34.9 121.661,34.9 121.81,35.049 C19.2 123.05,37 125,38.95 125.85,39.8 125.85,43.9 126.65,44.7 129.061,44.7 129.21,44.849 C14.2
NetB1_12: B1.12 C9.2 D15.2 J1.A5 Q3.2 R5.1 R6.2 R13.2 U1.1 U1.2 U1.3 | length 221.6
  Top Layer w0.254: C9.2 5.255,11.955 34.195,11.955 v1(34.25,11.9) ; v1(39.35,11.7) 44.31,11.7 R5.1 45.915,13.475 44.919,13.475 44.694,13.7 v1(44.6,13.7) 44.65,13.75 44.65,16.3 v1(44.7,16.35) ; v1(43.55,9.85) 43.575,9.825 45.375,9.825 Q3.2 ; v1(51.4,27.05) 51.441,27.091 52.081,27.091 R6.2 56.8,29.81 59.91,26.7 61.6,26.7 61.7,26.8 66.99,26.8 67.49,27.3 76.15,27.3 79.65,23.8 79.65,22.95 80.4,22.2 81.2,22.2 v1(81.25,22.15) ; B1.12 110.827,28.773 115.227,28.773 115.227,28.71 115.7,28.237 115.7,27.5 115.5,27.3 v1(112,27.3) ; D15.2 111.3,11.9 112.751,11.9 112.9,12.049 112.9,12.687 113.35,13.137 v1(113.35,13.2) ; v1(111.35,26.246) 111.35,26.198 112.9,24.648 v1(112.9,24.6) ; v1(116.2,7.85) 116.2,7.756 116.633,7.323 116.633,6.967 117,6.6 119.288,6.6 119.788,7.1 J1.A5 ; R13.2 118.49,36.41 120.35,34.55 123.35,34.55 123.95,33.95 123.95,33.7 v1(125.15,32.5) ; v1(119.95,29.05) 119.975,29.025 121.45,29.025 U1.2 ; v1(120.9,31.4) 120.9,31.306 121.177,31.029 121.177,30.16 121.337,30 U1.1 U1.2 ; U1.3 U1.2
  Bottom Layer w0.254: v1(34.25,11.9) 34.344,11.9 34.544,11.7 v1(39.35,11.7) ; v1(43.55,9.85) 43.55,13.2 44,13.65 44.55,13.65 v1(44.6,13.7) ; v1(44.7,16.35) 45.75,16.35 51.65,22.25 51.65,26.706 51.4,26.956 v1(51.4,27.05) ; v1(81.25,22.15) 87.85,15.55 87.85,14.9 88.2,14.55 104.95,14.55 112.9,22.5 v1(112.9,24.6) ; v1(111.35,26.246) 111.934,26.83 111.934,27.234 v1(112,27.3) ; v1(113.35,13.2) 110.003,13.2 109.803,13.4 106.549,13.4 106.4,13.251 106.4,10.525 108.352,8.573 110.14,8.573 110.344,8.777 112.132,8.777 113.059,7.85 v1(116.2,7.85) ; v1(115.25,28.75) 119.556,28.75 119.856,29.05 v1(119.95,29.05) ; v1(120.9,31.4) 122,32.5 v1(125.15,32.5)
NetB1_13: B1.13 D16.2 J1.A7 J1.B7 | length 42.8
  Top Layer w0.254: D16.2 105.565,12.065 105.673,12.173 105.738,12.173 106.465,12.9 v1(107.65,12.9) ; B1.13 111.95,29.3 v1(112,29.25) ; v1(115.85,10.75) 118.5,8.1 J1.A7 122.348,8.052 122.848,8.052 J1.B7
  Bottom Layer w0.254: v1(107.65,12.9) 109.8,10.75 v1(115.85,10.75) 115.85,11.6 113.4,14.05 113.4,18.85 114.5,19.95 114.5,25.75 112,28.25 v1(112,29.25)
NetB1_14: B1.14 C17.2 D17.2 J1.A6 J1.B6 | length 58.1
  Top Layer w0.254: B1.14 110.823,29.823 112.723,29.823 v1(112.75,29.85) ; v1(114.35,17.55) 114.416,17.484 114.416,17.249 115.735,15.93 D17.2 ; v1(116.5,11.5) 118.834,9.166 119.284,9.166 v1(119.35,9.1) ; v1(119.15,7.4) 119.244,7.4 119.444,7.6 J1.A6 ; J1.B6@123.265,8.065 J1.B6
  Bottom Layer w0.254: C17.2 113.55,4.74 116.141,4.74 117.5,6.099 117.849,6.099 v1(119.15,7.4) 118.15,7.4 117.2,8.35 117.2,8.65 117.95,9.4 118.448,9.4 118.682,9.166 119.284,9.166 v1(119.35,9.1) 119.35,9.858 119.677,10.185 119.677,10.848 119.623,10.902 119.623,11.298 119.902,11.577 120.498,11.577 121.477,10.598 121.477,9.612 121.45,9.585 121.45,8.6 122.15,7.9 122.15,7.799 122.299,7.65 122.85,7.65 J1.B6 ; v1(112.75,29.85) 112.75,28.65 117.55,23.85 117.55,20 115.1,17.55 v1(114.35,17.55) 114.35,13.7 116.5,11.55 v1(116.5,11.5)
NetB1_15: B1.15 R8.1 | length 48
  Top Layer w0.254: B1.15 111.651,30.3 111.8,30.449 111.8,31.65 v1(111.1,32.35)
  Bottom Layer w0.254: R8.1 81.3,35.4 83.85,37.95 86.6,37.95 89.7,41.05 95.9,41.05 100.4,45.55 106.55,45.55 108.3,43.8 108.3,41.05 111.277,38.073 111.277,34.487 111.1,34.31 v1(111.1,32.35)
NetB1_17: B1.17 C7.1 D7.2 Q2.1 | length 108.9
  Top Layer w0.254: D7.2 52.606,2.4 52.956,2.75 v1(53.05,2.75) ; C7.1 60.05,9.04 v1(60.05,10.6) ; v1(86.4,41.75) 87.18,41.75 88.53,43.1 Q2.1 ; v1(94.6,45.25) 101.95,37.9 107.2,37.9 109.3,35.8 B1.17
  Bottom Layer w0.254: v1(53.05,2.75) 58.05,7.75 58.05,9.65 59,10.6 v1(60.05,10.6) 62.05,12.6 62.05,19.05 65.65,22.65 65.65,32.65 70.1,37.1 77.1,37.1 81.75,41.75 v1(86.4,41.75) 90.297,41.75 90.497,41.55 94.3,41.55 94.6,41.85 v1(94.6,45.25)
NetB1_18: B1.18 Q2.2 | length 27.8
  Top Layer w0.254: Q2.2 89.8,45.701 89.949,45.85 92.927,45.85 104.727,34.05 107.15,34.05 108.8,32.4 B1.18
NetB1_19: B1.19 C10.2 | length 23.4
  Top Layer w0.254: C10.2 97,44.75 102.75,39 v1(104.45,39) ; v1(106.8,33.377) 108.277,31.9 108.277,31.323 B1.19
  Bottom Layer w0.254: v1(104.45,39) 104.45,35.903 103.9,35.353 103.9,32.858 104.049,32.709 105.044,32.709 105.711,33.377 v1(106.8,33.377)
NetB1_20: B1.20 C12.2 | length 16.2
  Top Layer w0.254: v1(104.388,33.512) 104.45,33.45 104.45,32.65 105.8,31.3 B1.20
  Bottom Layer w0.254: v1(104.388,33.512) 104.503,33.512 104.927,33.936 104.927,42.266 105.076,42.415 106.208,42.415 106.802,43.01 C12.2
NetB2_2: B2.2 R20.1 | length 27.3
  Top Layer w0.254: R20.1 92.4,14.1 92.8,13.7 102.95,13.7 104.45,15.2 104.45,17.532 106.168,19.25 109.55,19.25 110.74,20.44 B2.2
NetB3_1: B3.1 Q4.2 | length 109.6
  Top Layer w0.254: v1(30.15,9.35) 30.175,9.375 32.275,9.375 B3.1 ; v1(44.6,5.112) 50.285,5.112 50.378,5.019 55.969,5.019 57.75,6.8 60.55,6.8 61.369,7.619 70.914,7.619 72.876,9.581 82.422,9.581 84.984,7.019 109.119,7.019 123.9,21.8 Q4.2
  Bottom Layer w0.254: v1(30.15,9.35) 30.15,5.45 30.4,5.2 44.451,5.2 44.539,5.112 v1(44.6,5.112)
NetB3_5: B3.5 B3.6 C20.1 D5.2 | length 96.2
  Top Layer w0.254: v1(31.95,10.85) 33.025,10.85 34.475,9.4 B3.6 B3.5 ; v1(42.5,31.55) 43.35,32.4 D5.2 55.35,32.4 59.7,28.05 76.4,28.05 79.789,24.661 84.648,24.661 85.281,24.028 85.281,23.132 84.95,22.801 84.95,22.35 85.617,21.683 87.317,21.683 v1(88,21) ; v1(91,21.15) 95.04,21.15 C20.1
  Bottom Layer w0.254: v1(31.95,10.85) 31.95,13.15 36.2,17.4 36.2,25.25 v1(42.5,31.55) ; v1(88,21) 88.05,21.05 90.806,21.05 90.906,21.15 v1(91,21.15)
NetC1_1: C1.1 D3.2 R1.1 | length 49.6
  Top Layer w0.254: R1.1 31.59,46.56 32.7,45.45 41.35,45.45 43.85,42.95 43.85,39.4 44.46,38.79 C1.1
  Bottom Layer w0.254: D3.2 7.873,43.503 7.873,44.573 12.35,49.05 30.74,49.05 R1.1
NetC1_2: C1.2 C2.1 L1.2 R1.2 X1.10 | length 80.7
  Top Layer w0.254: v1(19.3,29.75) 19.35,29.75 20.8,28.3 C2.1 ; v1(24.6,41.55) 24.6,47.927 24.477,48.05 L1.2 24.6,48.05 26.15,48.05 27.8,49.7 37.71,49.7 R1.2 44.21,48.2 C1.2 46.09,46.5 74.12,46.5 X1.10@76.02,44.6
  Bottom Layer w0.254: v1(19.3,29.75) 19.3,36.209 22.241,39.15 23.701,39.15 23.85,39.299 23.85,40.6 24.55,41.3 24.55,41.5 v1(24.6,41.55)
NetC4_1: C4.1 D2.2 D8.1 | length 43.3
  Top Layer w0.254: v1(12.35,39.1) 13.39,40.14 C4.1 ; v1(15.85,38.5) 22.75,38.5 23.2,38.05 23.2,37.5 v1(24.7,36) ; D8.1 26.8,19.646 29.4,22.246 29.4,32.33 D2.2 27.887,33.843 v1(26.857,33.843)
  Bottom Layer w0.254: v1(12.35,39.1) 12.95,38.5 v1(15.85,38.5) ; v1(24.7,36) v1(26.857,33.843)
NetC5_1: C5.1 D2.1 L1.1 | length 38.6
  Top Layer w0.254: v1(23.3,46.75) 23.366,46.816 23.366,47.966 L1.1 ; v1(26.55,45.65) 26.616,45.584 26.816,45.584 D2.1 29.15,43.25 v1(32.85,43.25) ; v1(35.8,28.25) 40,24.05 C5.1
  Bottom Layer w0.254: v1(23.3,46.75) 25.45,46.75 v1(26.55,45.65) ; v1(32.85,43.25) 35.8,40.3 v1(35.8,28.25)
NetC6_2: C6.2 C11.1 D6.2 D10.2 D12.2 R9.1 U1.6 U1.7 U1.8 | length 209.1
  Top Layer w0.254: D6.2 57.699,11.95 57.55,11.801 57.55,10.8 54.25,7.5 51.608,7.5 49.901,5.793 44.318,5.793 44.225,5.7 44.187,5.7 44.037,5.55 41.65,5.55 41.092,4.992 35.792,4.992 34.723,3.923 33.423,3.923 32.35,2.85 D12.2 34.536,2.4 36.567,0.369 66.269,0.369 74.5,8.6 C11.1 ; v1(77.5,6.2) 76.21,7.49 C11.1 ; R9.1 81.6,22.75 81.959,22.391 84.172,22.391 84.631,21.932 84.631,21.368 83.855,20.592 82.492,20.592 v1(81.65,19.75) ; v1(90,33.1) 90,35.806 90.15,35.956 v1(90.15,36.05) ; v1(92.3,4.6) 92.25,4.55 83.3,4.55 79.25,8.6 C11.1 ; v1(96.6,9.65) 96.694,9.65 96.846,9.802 98.327,9.802 D10.2 ; v1(113.05,25.7) 113.054,25.696 120.326,25.696 120.672,25.35 127.701,25.35 127.85,25.499 127.85,26.087 ; U1.6 126.991,26.066 127.83,26.066 127.85,26.087 ; U1.7 127.444,27 127.769,26.674 127.85,26.674 ; U1.8 126.991,27.934 127.766,27.934 127.85,27.85 127.85,26.674 ; 127.85,26.087 127.85,26.674
  Bottom Layer w0.254: v1(77.5,6.2) 78.75,6.2 81.65,9.1 v1(81.65,19.75) ; R9.1 84.1,26.08 84.1,29.601 84.249,29.75 86.95,29.75 87.25,30.05 87.25,30.35 v1(90,33.1) 92.006,31.094 92.737,31.094 94.677,29.153 94.677,28.273 96.237,26.713 97.11,26.713 98.374,27.977 104.527,27.977 106.804,25.7 v1(113.05,25.7) ; v1(90.15,36.05) 90.15,36.144 90.41,36.404 C6.2 ; v1(92.3,4.6) 96.6,8.9 v1(96.6,9.65)
NetC8_1: C8.1 D7.1 D11.2 J1.A4 J1.A9 J1.B4 J1.B9 Q2.3 R8.2 | length 142.3
  Top Layer w0.254: D7.1 41.486,2.4 43.517,4.431 55.169,4.431 57.35,2.25 v1(64.05,2.25) ; v1(89.45,8.1) 89.544,8.1 89.771,8.327 91.737,8.327 92.055,8.645 92.055,8.955 89.009,12.001 89.009,21.145 90.031,22.167 90.031,31.833 88.81,33.054 R8.2 87.65,36.56 87.65,40.55 88.5,41.4 89.37,41.4 91.07,43.1 Q2.3 ; C8.1 102.6,8.8 102.85,9.05 v1(108.55,9.05) ; D11.2 v1(93,49.45) ; v1(119.2,10.65) 120.75,9.1 J1.A9 122.325,9.075 123.425,9.075 J1.B4 ; J1.A4 122.325,6.625 123.425,6.625 J1.B9
  Bottom Layer w0.254: v1(64.05,2.25) 84.55,2.25 89.45,7.15 v1(89.45,8.1) ; Q2.3 91.07,44.302 90.55,44.822 90.55,49.05 90.95,49.45 v1(93,49.45) ; v1(108.55,9.05) 109.746,10.246 117.626,10.246 118.03,10.65 v1(119.2,10.65)
NetC13_1: C13.1 R14.2 | length 5.5
  Top Layer w0.254: R14.2 96.69,35.3 101.91,35.3 C13.1
NetC13_2: C13.2 D13.1 Q4.3 | length 50.1
  Top Layer w0.254: C13.2 105.901,43.01 106.678,42.233 113.758,42.233 D13.1 113.925,41.95 116.425,39.45 117.05,39.45 v1(117.1,39.5) ; v1(119.7,39.55) 119.722,39.528 120.381,39.528 126.15,33.759 126.15,32.5 126.7,31.95 129.65,31.95 131.1,30.5 131.1,24.099 129.387,22.386 126.756,22.386 124.9,20.53 Q4.3
  Bottom Layer w0.254: v1(117.1,39.5) 117.125,39.525 119.675,39.525 v1(119.7,39.55)
NetC14_1: C14.1 R15.2 | length 16
  Top Layer w0.254: R15.2 112.29,45.5 116.801,45.5 116.95,45.649 116.95,48.85 117.1,49 120.05,49 121.59,47.46 C14.1
NetC16_1: C16.1 C17.1 D14.1 D15.1 D16.1 D17.1 | length 40.9
  Top Layer w0.254: C16.1 104.24,8.05 106.45,8.05 v1(106.5,8.1) ; D16.1 104.835,11.135 v1(104.1,10.4) 106.478,10.4 108.078,12 D15.1 110.47,13.451 111.29,14.272 114.807,14.272 D17.1@115.735,15.2 ; D17.1 D17.1@115.735,15.2 ; v1(117.45,18.15) 113.649,18.15 113.5,18.001 113.5,15.7 114,15.2 D17.1@115.735,15.2 ; v1(119.2,15.75) 119.266,15.816 119.751,15.816 120.735,16.8 D14.1
  Bottom Layer w0.254: v1(104.1,10.4) 104.15,10.4 106.45,8.1 v1(106.5,8.1) ; C16.1 104.29,7.9 104.29,3.3 C17.1 ; v1(117.45,18.15) 119.169,16.431 119.169,15.781 v1(119.2,15.75)
NetC19_1: C19.1 R21.2 | length 23.6
  Top Layer w0.254: C19.1 114.19,34.46 114.75,33.9 122.601,33.9 122.75,33.751 122.75,32.35 123.8,31.3 129.25,31.3 129.6,30.95 R21.2
NetD1_1: D1.1 F1.2 | length 9.5
  Top Layer w0.254: F1.2 1.424,45.201 1.424,46.801 1.573,46.95 6.72,46.95 D1.1
NetD1_12: C3.2 C4.2 D1.2 D2.4 D9.1 R2.2 | length 55.9
  Top Layer w0.254: C3.2 5.96,26.41 v1(8.45,28.9) ; v1(8.8,33.75) 8.86,33.75 11.31,36.2 D9.1 11.75,36.2 17.35,41.8 C4.2 21.051,41.841 21.991,41.841 23.25,43.1 23.25,44.05 ; D1.2 17.53,47.3 20.65,47.3 21.113,46.837 21.113,46.387 22.05,45.45 R2.2 22.05,45.25 23.25,44.05 ; v1(23.853,43.7) 23.759,43.7 23.409,44.05 23.25,44.05 ; v1(29.05,40.8) 32.15,40.8 34.685,43.335 D2.4
  Bottom Layer w0.254: v1(8.45,28.9) 8.45,33.306 8.8,33.656 v1(8.8,33.75) ; D1.2 D1.2@18.103,47.873 ; v1(23.853,43.7) 26.061,43.7 28.961,40.8 v1(29.05,40.8)
NetD3_1: D3.1 D4.1 D6.1 Q1.1 R3.1 X1.7 | length 144
  Top Layer w0.254: D3.1 7.02,32.15 24.2,32.15 27.15,35.1 31.85,35.1 37.04,29.91 R3.1 ; v1(61.3,29.15) 61.394,29.15 61.544,29 v1(71.75,29) 72.35,29.6 78.2,29.6 v1(78.75,30.15) 79.85,29.05 v1(85.35,29.05) ; D6.1 68.8,5 v1(69.55,5.75) ; v1(78.8,33.5) 78.85,33.45 85,33.45 85.75,34.2 85.75,38.1 82,41.85 Q1.1 ; v1(87.05,26.4) 87.05,24.475 D4.1
  Bottom Layer w0.254: R3.1 51.2,30.22 51.75,30.77 51.75,30.95 52.2,31.4 55.2,31.4 57.45,29.15 v1(61.3,29.15) ; v1(69.55,5.75) 73.15,9.35 73.15,17.72 ccw(c72.31,18.4) 73.15,19.08 73.15,25.15 72.55,25.15 71.75,25.95 v1(71.75,29) ; v1(78.75,30.15) 78.775,30.175 78.775,33.475 v1(78.8,33.5) ; v1(85.35,29.05) 87.05,27.35 v1(87.05,26.4)
NetD4_2: D4.2 R5.2 | length 49.4
  Top Layer w0.254: R5.2 48.61,21.01 v1(49.65,22.05) ; v1(49.8,24.3) 56.071,24.3 57.202,23.169 63.789,23.169 67.12,26.5 v1(73.8,26.5) ; v1(79.569,26.9) 79.65,26.9 80.6,27.85 87.55,27.85 88,28.3 D4.2
  Bottom Layer w0.254: v1(49.65,22.05) 49.65,24.056 49.8,24.206 v1(49.8,24.3) ; v1(73.8,26.5) 79.156,26.5 79.556,26.9 v1(79.569,26.9)
NetD5_1: D5.1 X1.5 | length 15.3
  Top Layer w0.254: D5.1 59.606,25.45 X1.5@60.456,24.6 ; X1.5@60.486,24.3 X1.5@60.81,24.3
NetD8_2: D8.2 D9.2 R10.2 | length 78.6
  Top Layer w0.254: D9.2 23.314,34.716 23.884,34.716 v1(23.95,34.65) 25.982,34.65 26.94,35.608 53.692,35.608 57.85,31.45 79.1,31.45 80.45,32.8 83.001,32.8 83.15,32.651 83.15,32.25 R10.2 ; v1(25.45,31.8) 25.45,25.18 D8.2
  Bottom Layer w0.254: v1(23.95,34.65) 25.45,33.15 v1(25.45,31.8)
NetD10_1: D10.1 Q1.2 R9.2 | length 77.4
  Top Layer w0.254: v1(77.1,4.1) 80.184,1.016 97.816,1.016 97.965,1.165 97.965,2.852 99.038,3.925 D10.1 ; R9.2 82.681,30.119 84.769,30.119 85.55,30.9 85.55,33.25 85.95,33.65 86.401,33.65 86.55,33.799 86.55,40.25 85.166,41.634 84.736,41.634 83.27,43.1 Q1.2
  Bottom Layer w0.254: v1(77.1,4.1) 76.35,4.1 74.75,5.7 74.75,11.45 80.25,16.95 80.25,30.8 80.519,31.069 81.469,31.069 R9.2
NetD12_1: D12.1 X1.6 | length 62.8
  Top Layer w0.254: D12.1 25.4,2.85 26.473,3.923 29.723,3.923 v1(31.75,5.95) ; v1(40.05,9) 42.233,11.183 50.983,11.183 55.367,15.567 67.417,15.567 v1(69.75,17.9) ; v1(70.45,23.2) 71.85,24.6 X1.6@76.02,24.6
  Bottom Layer w0.254: v1(31.75,5.95) 37,5.95 v1(40.05,9) ; v1(69.75,17.9) 70.45,18.6 v1(70.45,23.2)
NetJ1_A1: J1.A1 J1.A12 J1.B1 | length 9.3
  Top Layer w0.254: v1(120.9,5.3) 120.994,5.3 121.194,5.1 J1.A1 ; v1(121,10.4) 121.094,10.4 121.294,10.6 J1.A12 123.043,10.6 123.343,10.9 J1.B1
  Bottom Layer w0.254: v1(120.9,5.3) 120.95,5.35 120.95,10.35 v1(121,10.4)
NetJ1_B12: J1.B12 J1.S1 J1.S2 J1.S3 J1.S4 | length 20.1
  Top Layer w0.254: v1(120.05,4.6) 120.144,4.6 120.292,4.748 123.398,4.748 123.374,4.724 123.374,4.448 122.65,3.724 J1.S1 ; v1(120.1,11.1) 121.268,12.268 122.568,12.268 J1.S4 ; J1.B12 126.8,4.8 J1.S2
  Bottom Layer w0.254: v1(120.05,4.6) 120.075,4.625 120.075,11.075 v1(120.1,11.1)
NetQ1_3: Q1.3 R7.2 U1.4 | length 54.2
  Top Layer w0.254: Q1.3 84.54,44.1 86.39,45.95 88.16,45.95 R7.2 92.035,47.4 93.069,46.365 94.735,46.365 102.8,38.3 108.5,38.3 109.473,37.327 110.304,37.327 112.7,34.93 112.7,33.9 113.5,33.1 120.642,33.1 120.791,32.951 120.791,32.741 117.73,29.68 117.73,29.47 120.2,27 U1.4
NetR3_2: R3.2 X1.9 | length 35.9
  Top Layer w0.254: R3.2 77.16,47.69 78.5,46.35 78.5,41.7 76.4,39.6 X1.9@76.02,39.6
NetR10_1: R10.1 U1.10 | length 58.4
  Top Layer w0.254: v1(98.75,20.6) 102.1,23.95 123.534,23.95 124.134,24.55 128.15,24.55 128.5,24.9 128.5,29.151 128.109,29.543 127.856,29.543 127.398,30 U1.10
  Bottom Layer w0.254: R10.1 82.33,21.71 82.33,21.5 82.58,21.25 83.2,21.25 85.05,19.4 89.561,19.4 89.642,19.481 97.631,19.481 v1(98.75,20.6)
NetR16_2: R16.2 R19.2 | length 11.2
  Top Layer w0.254: R16.2 91.8,29.55 94.6,26.75 R19.2
NetR17_2: R17.2 R20.2 | length 4.8
  Top Layer w0.254: R20.2 92.456,24.754 93.481,24.754 93.935,24.3 95.315,24.3 95.719,24.704 96.694,24.704 R17.2
NetX1_2: X1.2 X1.3 | length 5
  Top Layer w0.254: X1.3@59.81,34.55 X1.2@59.81,39.55
VCC: F1.1 P1.2 | length 5.5
  Top Layer w0.254: P1.2 1.2,27.15 3.2,29.15 F1.1
pads on no net: B1.6 B1.7 B1.8 B1.9 B1.10 J1.A2 J1.A3 J1.A8 J1.A10 J1.A11 J1.B2 J1.B3 J1.B8 J1.B10 J1.B11 J1.MH5 J1.MH6 R11.2 R12.2 U1.9
copper on no net: | length 0.1
  Top Layer w0.254: 122.3,8.6 122.348,8.648

## Silkscreen, mask and mechanical layers (free items; w line width, h text height)
Mechanical 1:
  lines w0.254: -0.001,50.146 99.988,50.146 100,50.134 100,0 0,0 0,0.6 0,50.145 ; 0.199,50.346 0.201,50.854 ; 1.723,50.089 0.2,50.6 ; 1.725,51.105 0.2,50.6 ; 43.165,50.514 0.2,50.6 ; 57.435,50.486 100.4,50.4 ; 98.875,49.895 100.4,50.4 ; 98.877,50.911 100.4,50.4 ; 100.399,50.146 100.401,50.654
  text "100.2 (mm)" at 43.417,49.6 h1.52 r359.89

## Text inside footprints (layer, text, board x,y; h text height)
C2: Top Overlay "+" at 25.122,24.863 h1.5
D2: Top Overlay "~" at 28.677,33.563 h1.5; Top Overlay "~" at 39.345,39.659 h1.5; Top Overlay "-" at 39.225,34.191 h1.5; Top Overlay "+" at 28.677,40.167 h1.5
Q1: Top Overlay "3" at 85.233,45.875 h1.5 r90; Top Overlay "1" at 82.715,45.875 h1.5 r90
Q2: Top Overlay "1" at 89.245,45.875 h1.5 r90; Top Overlay "3" at 91.763,45.875 h1.5 r90
Q4: Top Overlay "3" at 126.675,19.837 h1.5; Top Overlay "1" at 126.675,22.355 h1.5